# EAGLE board carte suiveur (EAGLE 5.12)
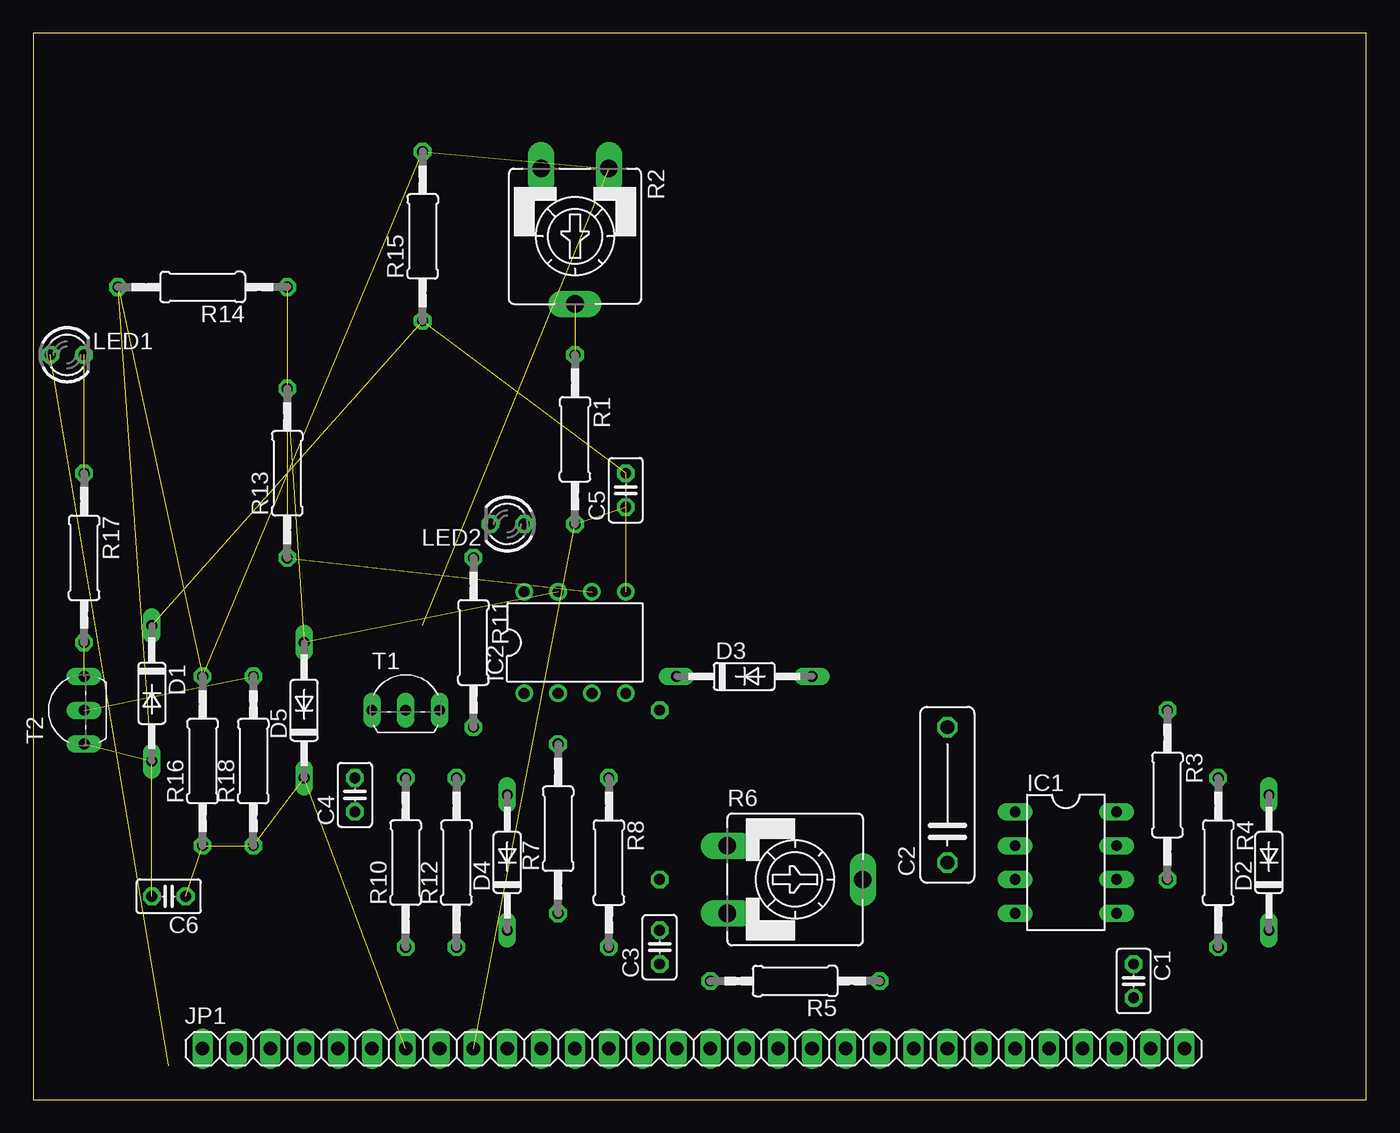
[diagram p0: board, top side]
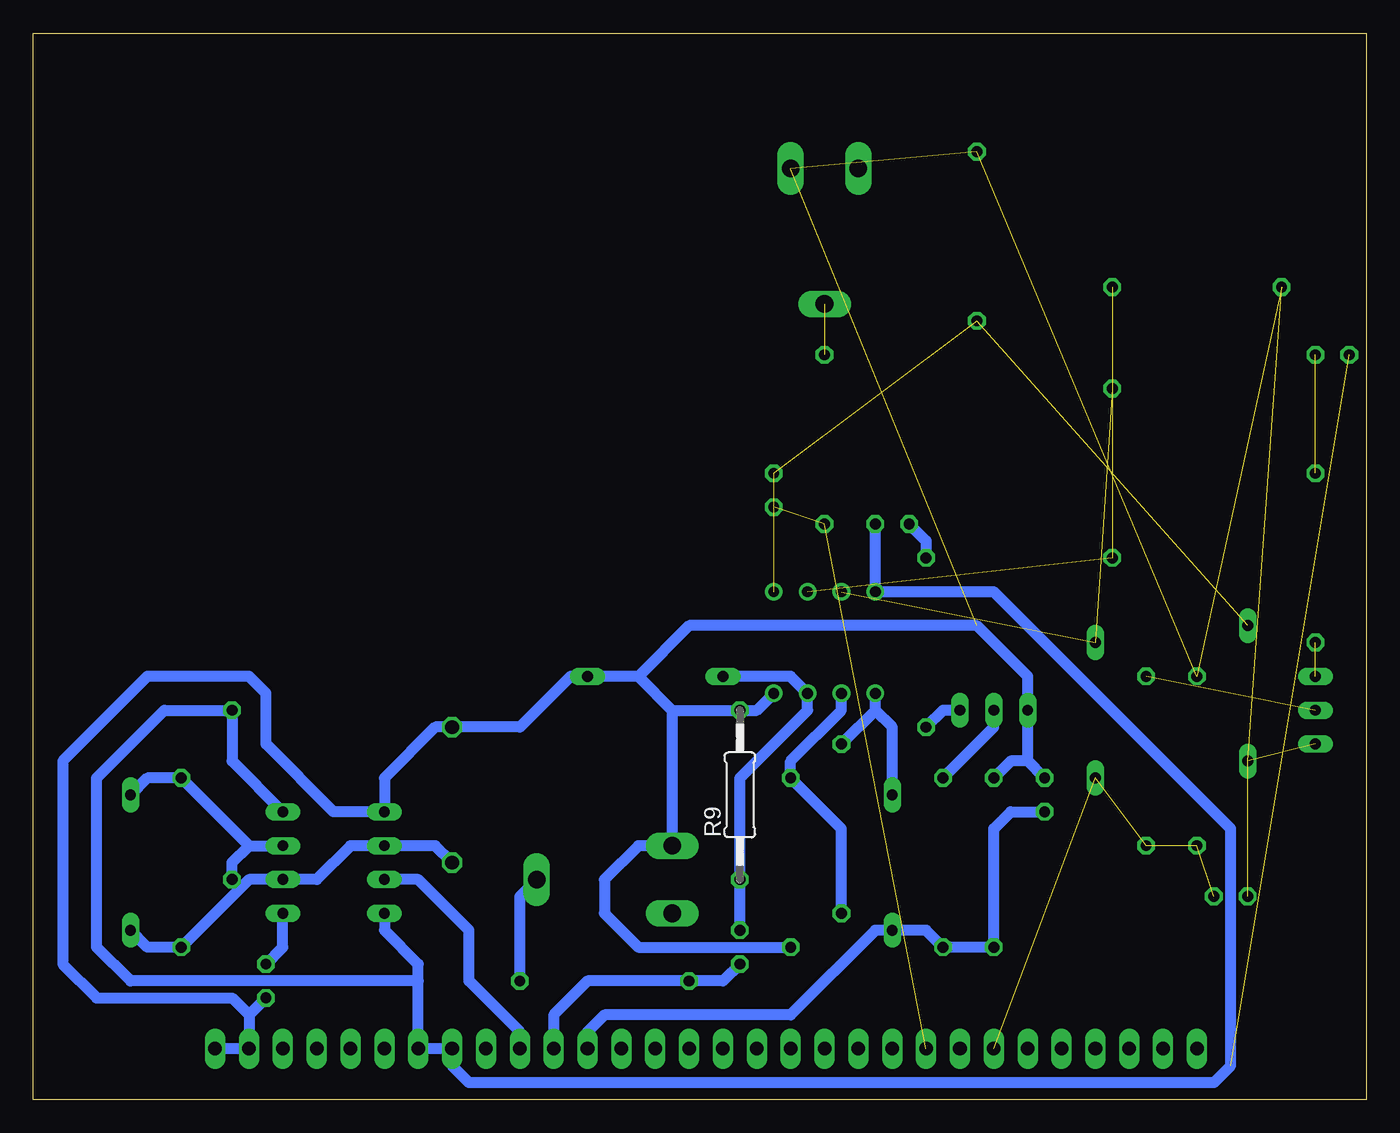
[diagram p1: board, bottom side, seen from below]

Size 100 x 80 mm. Coordinates in mm from the lower left corner, seen from the top.
Outline: 0,0 100,0 100,80 0,80 0,0
Copper layers (1*16): Top 0.035mm / dielectric 1.5mm / Bottom 0.035mm
Design rules "default": minimum track width 10mil, minimum drill 24mil, track to track 8mil, track to pad 8mil, pad to pad 8mil, via to via 8mil, smd to smd 8mil, copper to edge 40mil, drill to drill 8mil, minimum pad ring 10mil, minimum via ring 8mil, stop-mask expansion 4mil, vias tented up to drill 0mil, thermal gap 10mil

## Footprints (pad centres in the part's own frame; a part is rotated, then mirrored left to right if it is on the bottom)
C025-025X050 = drill 0.813 octagon: 1 -1.27,0; 2 1.27,0
C102-043X133 = drill 1.016 octagon: 1 -5.08,0; 2 5.08,0
DO35-10 = drill 0.813 long: A 5.08,0; C -5.08,0
DIL-08 = drill 0.813 long: 1 -3.81,-3.81; 2 -1.27,-3.81; 3 1.27,-3.81; 4 3.81,-3.81; 5 3.81,3.81; 6 1.27,3.81; 7 -1.27,3.81; 8 -3.81,3.81
DIL08 = drill 0.813 pad 1.27 round: 1 -3.81,-3.81; 2 -1.27,-3.81; 3 1.27,-3.81; 4 3.81,-3.81; 5 3.81,3.81; 6 1.27,3.81; 7 -1.27,3.81; 8 -3.81,3.81
1X30 = drill 1.016 long: 1 -36.83,0; 2 -34.29,0; 3 -31.75,0; 4 -29.21,0; 5 -26.67,0; 6 -24.13,0; 7 -21.59,0; 8 -19.05,0; 9 -16.51,0; 10 -13.97,0; 11 -11.43,0; 12 -8.89,0; 13 -6.35,0; 14 -3.81,0; 15 -1.27,0; 16 1.27,0; 17 3.81,0; 18 6.35,0; 19 8.89,0; 20 11.43,0; 21 13.97,0; 22 16.51,0; 23 19.05,0; 24 21.59,0; 25 24.13,0; 26 26.67,0; 27 29.21,0; 28 31.75,0; 29 34.29,0; 30 36.83,0
LED3MM = drill 0.813 octagon: A -1.27,0; K 1.27,0
0207/12 = drill 0.813 octagon: 1 -6.35,0; 2 6.35,0
CA9V = drill 1.321 long: A -2.54,-5.08; E 2.54,-5.08; S 0,5.08
TO92-EBC = drill 0.813 long: B 0,-1.27; C 2.54,-1.27; E -2.54,-1.27

## Placement (x,y rotation side)
C1  10n  [C025-025X050]  82.55,8.89 270 top
C2  1n  [C102-043X133]  68.58,22.86 90 top
C3  100n  [C025-025X050]  46.99,11.43 90 top
C4  100n  [C025-025X050]  24.13,22.86 90 top
C5  100n  [C025-025X050]  44.45,45.72 90 top
C6  100n  [C025-025X050]  10.16,15.24 180 top
D1  1N4148DO35-10  [DO35-10]  8.89,30.48 270 top
D2  1N4148DO35-10  [DO35-10]  92.71,17.78 90 top
D3  1N4148DO35-10  [DO35-10]  53.34,31.75 0 top
D4  1N4148DO35-10  [DO35-10]  35.56,17.78 90 top
D5  1N4148DO35-10  [DO35-10]  20.32,29.21 90 top
IC1  NE555  [DIL-08]  77.47,17.78 270 top
IC2  LM358N  [DIL08]  40.64,34.29 0 top
JP1  [1X30]  49.53,3.81 0 top
LED1  [LED3MM]  2.54,55.88 0 top
LED2  [LED3MM]  35.56,43.18 180 top
R1  4.7k  [0207/12]  40.64,49.53 270 top
R2  100k  [CA9V]  40.64,64.77 180 top
R3  33k  [0207/12]  85.09,22.86 270 top
R4  33k  [0207/12]  88.9,17.78 270 top
R5  4.7k  [0207/12]  57.15,8.89 180 top
R6  100k  [CA9V]  57.15,16.51 270 top
R7  5.6k  [0207/12]  39.37,20.32 90 top
R8  390  [0207/12]  43.18,17.78 270 top
R9  6.8k  [0207/12]  46.99,22.86 90 bottom
R10  57k  [0207/12]  27.94,17.78 90 top
R11  330  [0207/12]  33.02,34.29 270 top
R12  22k  [0207/12]  31.75,17.78 90 top
R13  5.6k  [0207/12]  19.05,46.99 90 top
R14  390  [0207/12]  12.7,60.96 180 top
R15  6.8k  [0207/12]  29.21,64.77 90 top
R16  57k  [0207/12]  12.7,25.4 90 top
R17  330  [0207/12]  3.81,40.64 270 top
R18  22k  [0207/12]  16.51,25.4 90 top
T1  [TO92-EBC]  27.94,30.48 0 top
T2  [TO92-EBC]  2.54,29.21 90 top

## Library data of the parts
C1-C6 R1 R3-R5 R7-R18 = resistor
D1-D5 = diode
IC1 = st-microelectronics; MF: Arrow Electronics; MPN: NE555N; OC_FARNELL: 1467742; OC_NEWARK: 89K1486
IC2 = linear
JP1 = pinhead
LED1 LED2 = led
R2 R6 = pot
T1 T2 = transistor-neu-to92

## Nets
GND: C1.2 C2.2 C4.2 C6.2 D1.A D3.A IC1.1 IC2.4 JP1.29 JP1.30 R2.A R6.A R8.2 R9.2 R10.2 R14.2 R15.2 R16.2 T1.E T2.E
N$1: LED1.K R17.1
N$2: D2.A IC1.7 R3.2 R4.1
N$3: C2.1 D2.C IC1.2 IC1.6 R4.2
N$4: C1.1 IC1.5
N$5: C5.2 D1.C IC2.5 R15.1
N$6: IC2.6 R13.1 R14.1
N$7: C3.2 D3.C IC2.3 R9.1
N$8: IC2.2 R7.1 R8.1
N$9: D4.A IC2.1 R7.2
N$10: R5.1 R6.S
N$12: D5.A IC2.7 R13.2
N$13: R1.1 R2.S
N$14: R11.2 T1.C
N$16: R17.2 T2.C
N$17: LED2.K R11.1
N$18: R18.2 T2.B
N$19: R12.2 T1.B
RETOUR_OEUIL_D: C5.1 JP1.9 R1.2
RETOUR_OEUIL_G: C3.1 JP1.20 R5.2
SIG_CARRE: IC1.3 JP1.21
SUIVI_D: C6.1 D5.C JP1.7 R16.1 R18.1
SUIVI_G: C4.1 D4.C JP1.19 R10.1 R12.1
VCC: IC1.4 IC1.8 IC2.8 JP1.23 JP1.24 LED1.A LED2.A R3.1

## Tracks (layer width: path | path; a pad name or v marks a point on that pad's centre or on a via)
GND  (7 unrouted)
  Bottom 0.813: 83.82,6.35 C1.2 | 83.82,6.35 JP1.29 JP1.30 | 83.82,6.35 85.09,7.62 95.25,7.62 97.79,10.16 97.79,25.4 91.44,31.75 83.82,31.75 82.55,30.48 82.55,26.67 77.47,21.59 IC1.1 73.66,24.13 69.85,27.94 C2.2 63.5,27.94 59.69,31.75 D3.A 54.61,31.75 | 54.61,31.75 52.07,29.21 | 52.07,29.21 R9.2 45.72,29.21 IC2.4 | 52.07,29.21 R6.A 54.61,19.05 57.15,16.51 57.15,13.97 54.61,11.43 R8.2 | 25.4,25.4 T1.E 25.4,31.75 29.21,35.56 50.8,35.56 54.61,31.75 | C4.2 25.4,25.4 | 25.4,25.4 26.67,25.4 R10.2
N$1  (1 unrouted)
N$2
  Bottom 0.813: D2.A 91.44,24.13 R4.1 83.82,19.05 | 83.82,19.05 IC1.7 | R3.2 85.09,17.78 83.82,19.05
N$3
  Bottom 0.813: D2.C 91.44,11.43 R4.2 83.82,16.51 IC1.6 78.74,16.51 76.2,19.05 IC1.2 69.85,19.05 C2.1
N$4
  Bottom 0.813: C1.1 81.28,11.43 IC1.5
N$5  (3 unrouted)
N$6  (2 unrouted)
N$7
  Bottom 0.813: C3.2 R9.1 46.99,24.13 41.91,29.21 IC2.3 43.18,31.75 D3.C
N$8
  Bottom 0.813: R7.1 39.37,20.32 R8.1 43.18,25.4 39.37,29.21 IC2.2
N$9
  Bottom 0.813: 36.83,29.21 IC2.1 | 36.83,29.21 R7.2 | D4.A 35.56,27.94 36.83,29.21
N$10
  Bottom 0.813: R6.S 63.5,15.24 R5.1
N$12  (2 unrouted)
N$13  (1 unrouted)
N$14
  Bottom 0.813: T1.C 31.75,29.21 R11.2
N$16  (1 unrouted)
N$17
  Bottom 0.813: LED2.K 33.02,41.91 R11.1
N$18  (1 unrouted)
N$19
  Bottom 0.813: T1.B 27.94,27.94 R12.2
RETOUR_OEUIL_D  (2 unrouted)
RETOUR_OEUIL_G
  Bottom 0.813: C3.1 48.26,8.89 R5.2 58.42,8.89 60.96,6.35 JP1.20
SIG_CARRE
  Bottom 0.813: JP1.21 63.5,5.08 67.31,8.89 67.31,12.7 71.12,16.51 IC1.3
SUIVI_D  (4 unrouted)
SUIVI_G
  Bottom 0.813: JP1.19 58.42,5.08 57.15,6.35 43.18,6.35 36.83,12.7 D4.C 33.02,12.7 R12.1 R10.1 27.94,20.32 26.67,21.59 C4.1
VCC  (1 unrouted)
  Bottom 0.813: 71.12,8.89 JP1.24 JP1.23 68.58,2.54 67.31,1.27 11.43,1.27 10.16,2.54 10.16,20.32 27.94,38.1 IC2.8 LED2.A | 71.12,8.89 71.12,10.16 73.66,12.7 IC1.4 | 71.12,8.89 92.71,8.89 95.25,11.43 95.25,24.13 90.17,29.21 R3.1 85.09,25.4 IC1.8